# Altium PCB KE_PDB_BMS_ver3.PcbDoc
Units mm, origin at the board's own origin, x right, y up, seen from the top; angles counter-clockwise.
Board outline 59.9 x 59.3 mm, 2 copper layers (L1 [Signal/Power], L4 [GND/Power]), stack 1.299 mm thick; 43 components, 31 nets, 161 pads, 47 vias.
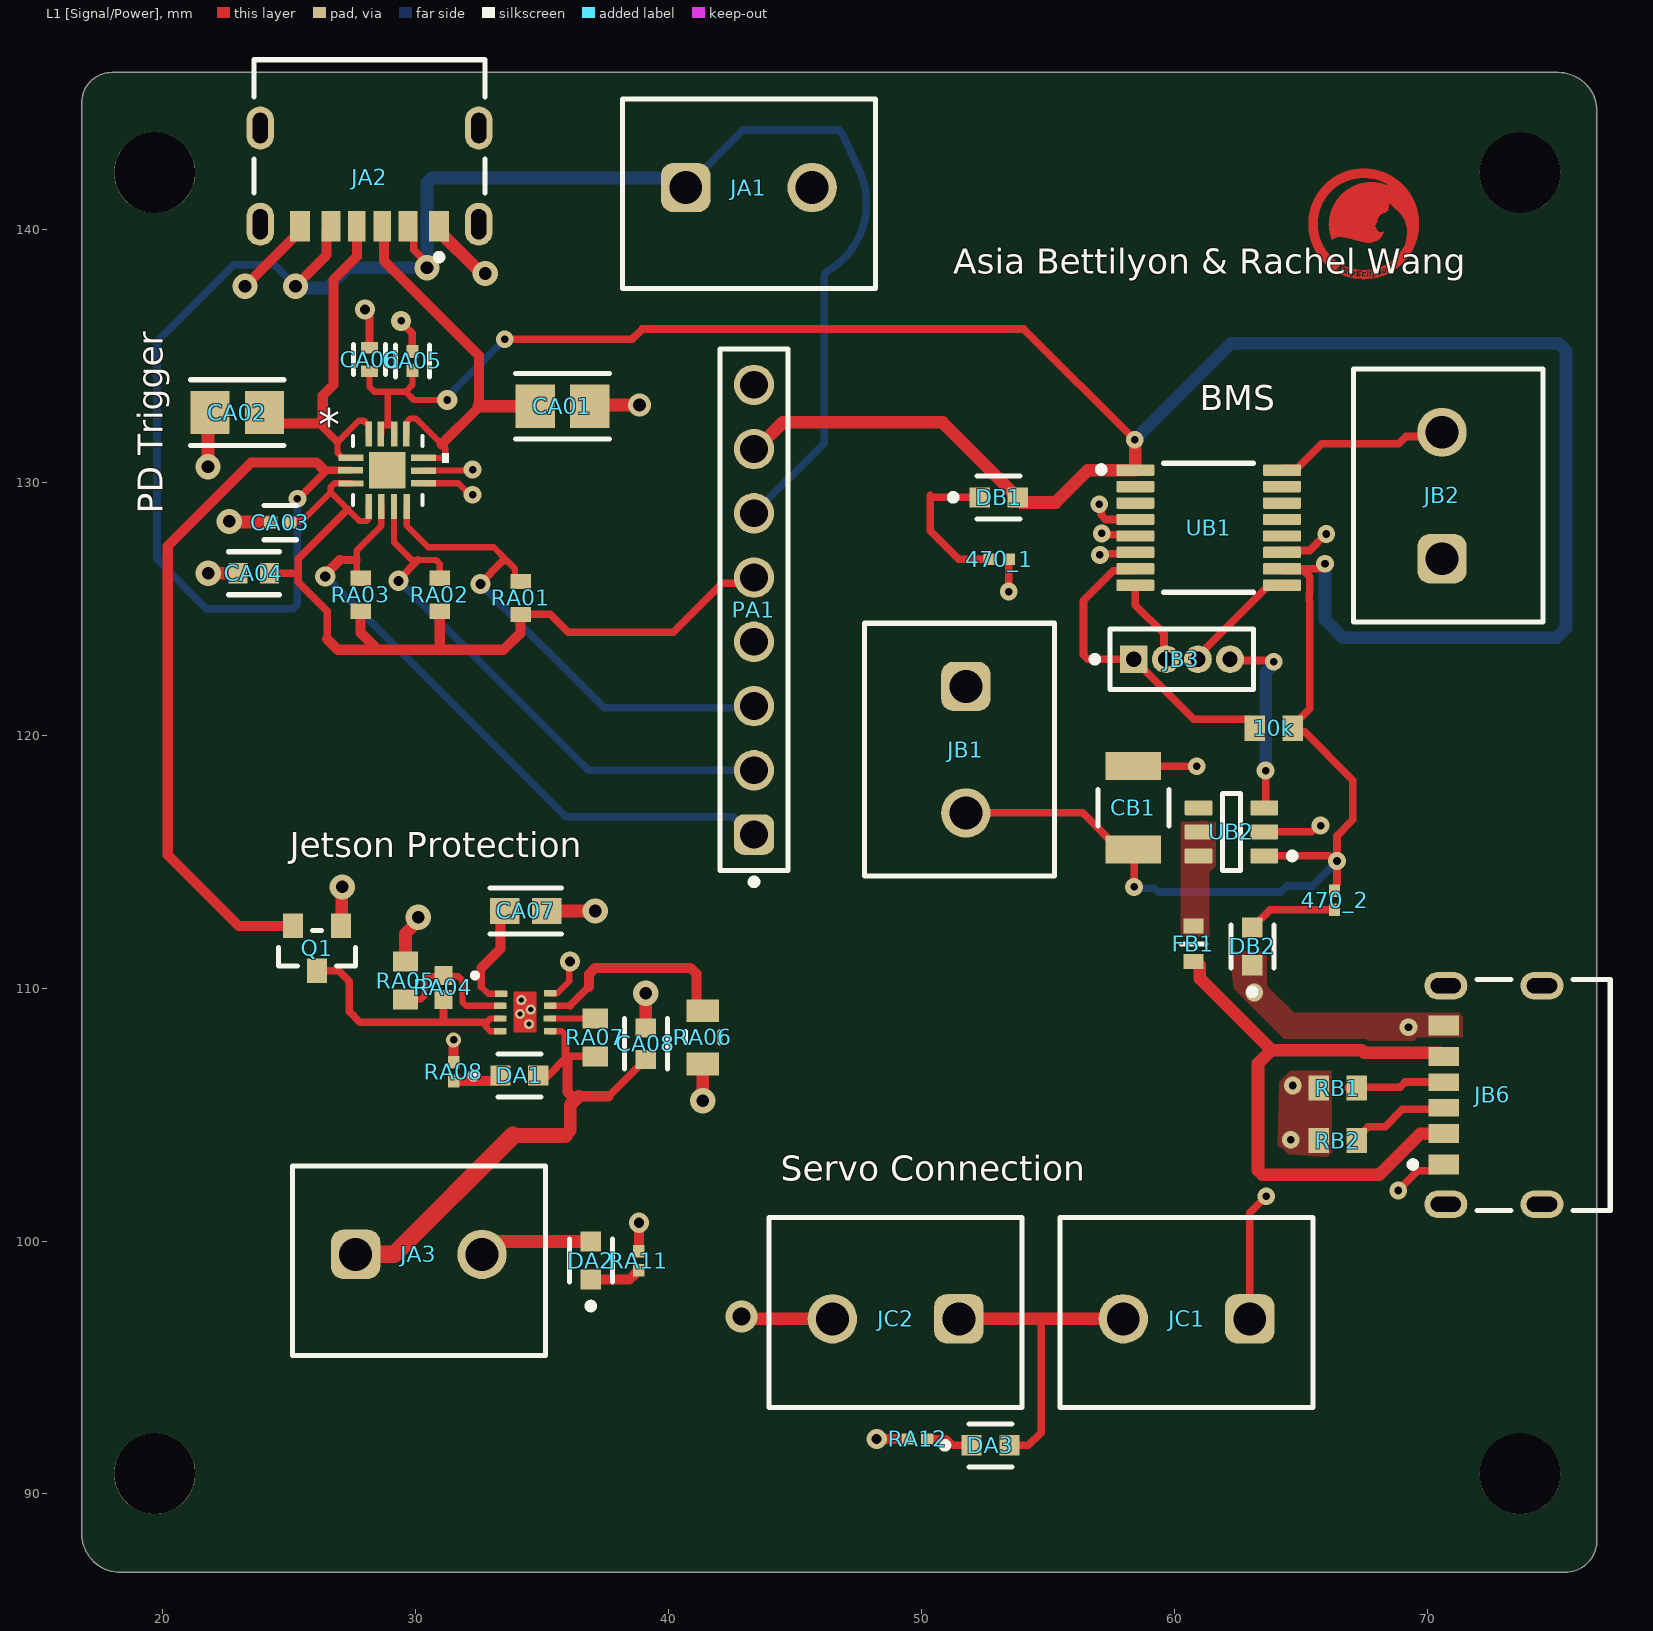
[diagram p0: L1 [Signal/Power] view]
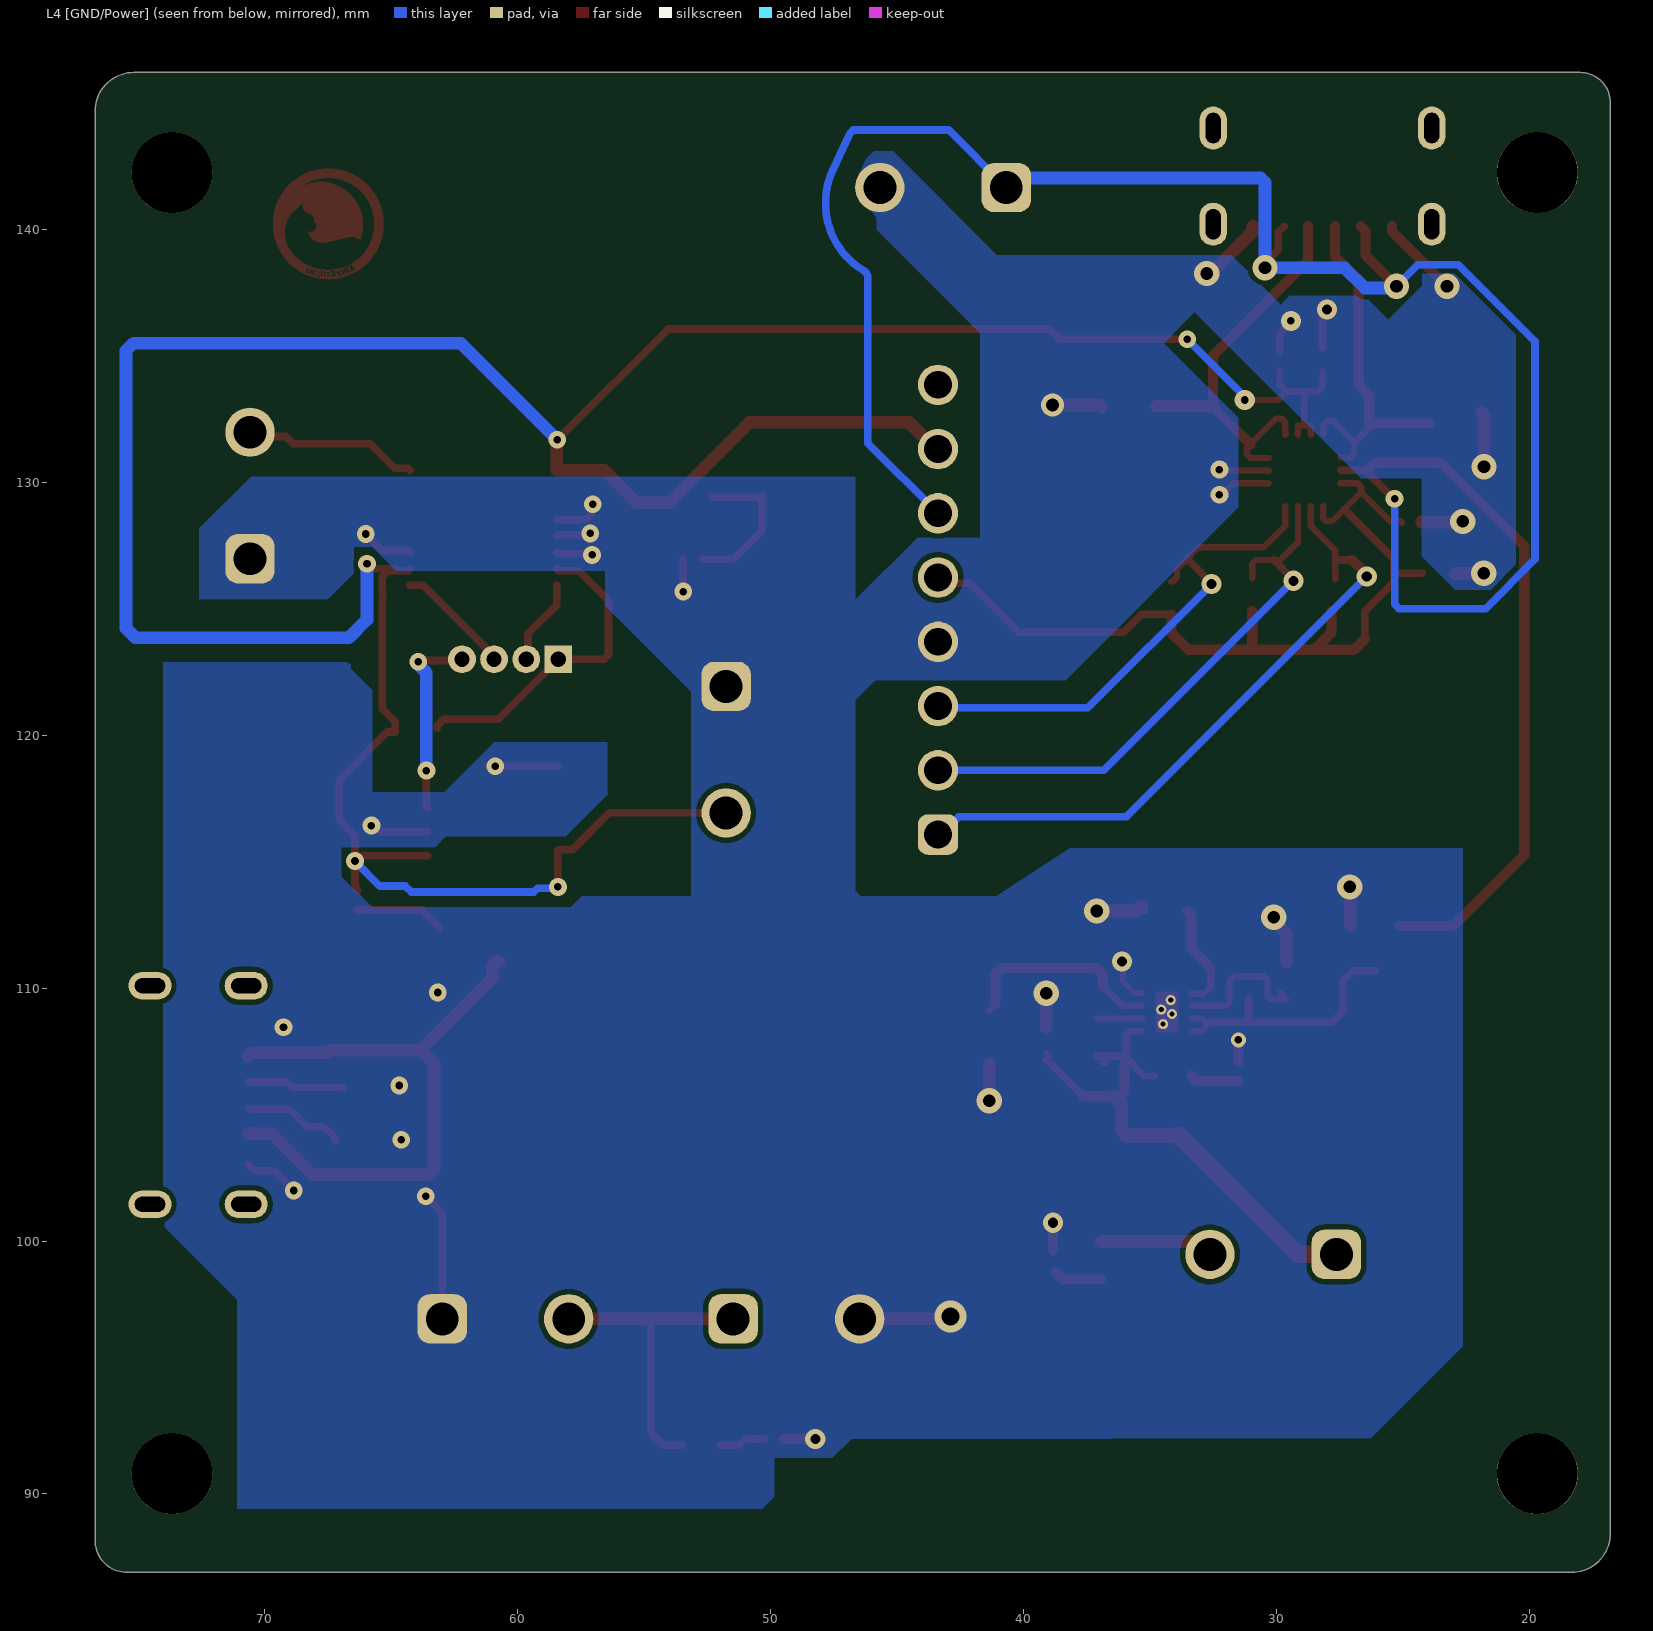
[diagram p1: L4 [GND/Power] view, seen from below]
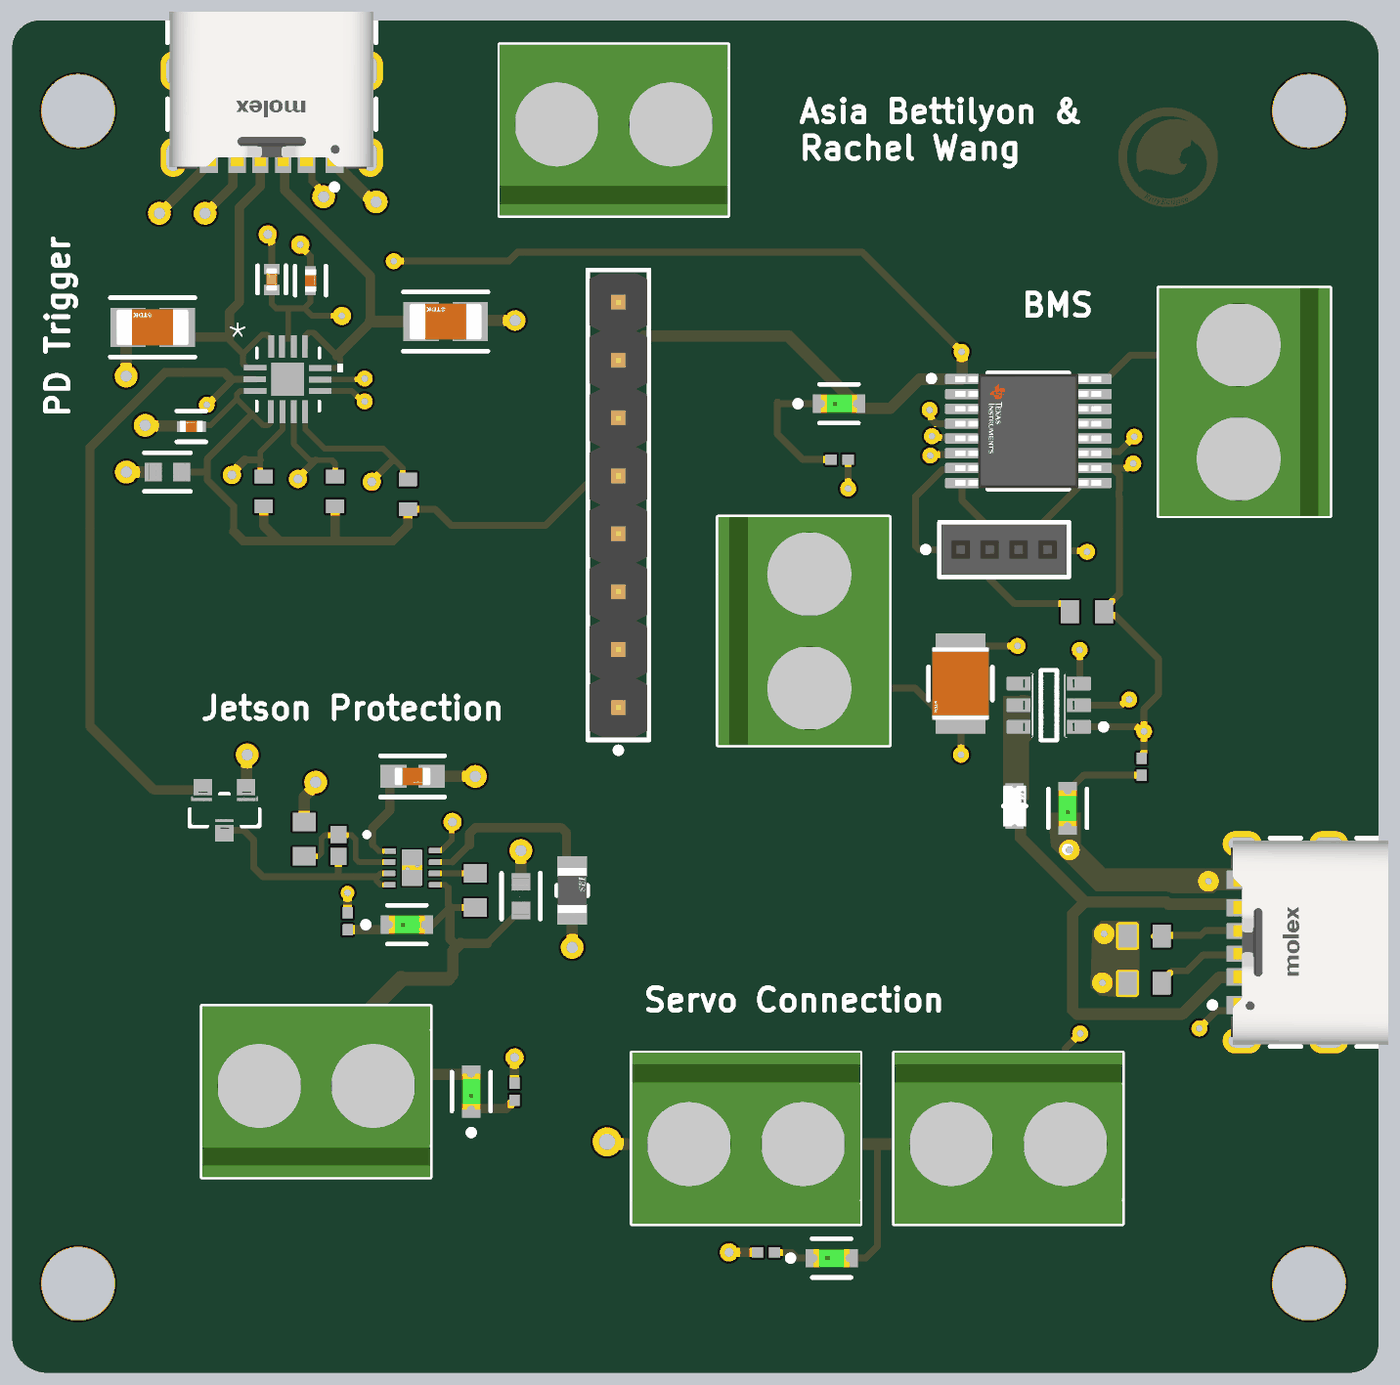
[diagram p2: 3D render of the assembled board from above, using the file's embedded part models]

## Layer stack, top to bottom
Top Solder: solder mask 0.0254, SM-001, Dk 4
L1 [Signal/Power]: signal copper 0.035
Dielectric 1: prepreg 0.1295, PP-017, Dk 4.3
Dielectric 2: prepreg 0.1295, PP-017, Dk 4.3
Dielectric 3: core 0.7112, Core-039, Dk 4.8
Dielectric 4: prepreg 0.1295, PP-017, Dk 4.3
Dielectric 5: prepreg 0.1295, PP-017, Dk 4.3
L4 [GND/Power]: signal copper 0.035
Bottom Solder: solder mask 0.0254, SM-001, Dk 4

## Board outline
16.8,88.432 16.8,145.01 cw(c17.99,145.01) 17.99,146.2 75.168,146.2 cw(c75.168,144.668) 76.7,144.668 76.7,88.17 cw(c75.43,88.17) 75.43,86.9 18.332,86.9 cw(c18.332,88.432)

## Design rules (kind name [scope] priority, off if disabled: settings)
Clearance [All] p1: gap=0.2 ignorepadtopadclearanceinfootprint=TRUE
HoleSize ViaHoleSize [IsVia] p1: absolutevalues=TRUE maxlimit=6.3 minlimit=0.15 maxpercent=80.000 minpercent=20.000
HoleToHoleClearance [All] p1: gap=0.025 allowstackedmicrovias=TRUE
MinimumSolderMaskSliver [All] p1: minsoldermaskwidth=0.025
PolygonConnect [All] p1: connectstyle=Direct reliefconductorwidth=0.254 reliefentries=4 polygonreliefangle="90 Angle" airgapwidth=0.254
RoutingVias [All] p1: holewidth=0.711 width=1.27 viastyle="Through Hole" minholewidth=0.711 minwidth=1.27 maxholewidth=0.711 maxwidth=1.27
SilkToSolderMaskClearance [IsPad] p1: minsilkscreentomaskgap=0.025 clearancetoexposedcopper=TRUE
SolderMaskExpansion [All] p1: expansion=0.102 istentingtop=FALSE
SupplyNets "Schematic Supply Nets" [InNet('GND')] p1: voltage=0.000
UnRoutedNet [All] p1: checkbadconnections=TRUE
Width [All] p1: maxlimit=1 minlimit=0.2 preferedwidth=0.3 minimp=50.000000 maximp=50.000000 favimp=50.000000
25 further rules are at their usual default settings.

## Components (designator, comment, footprint, x,y, rotation, side; value= is the part's Value field where it differs from the comment)
10k "10k" RESC1608X55X25ML10T15 63.925,120.275 r180 top
470_1 "RC0402JR-07470RL" RESC1005X40X25LL05T10 53.075,126.95 r180 top
470_2 "RC0402JR-07470RL" RESC1005X40X25LL05T10 66.325,113.475 r270 top
CA01 "470pF" FP-C3216-085-0_2-IPC_C 35.8,133 r180 top
CA02 "470pF" FP-C3216-085-0_2-IPC_C 22.949,132.75 r180 top
CA03 "0.1uF" FP-CL93-IPC_C 24.65,128.4 r180 top
CA04 "1uF" FP-CL10-IPC_C 23.6,126.4 r180 top
CA05 "0.1uF" FP-CL93-IPC_C 29.875,134.796 r90 top
CA06 "10uF" FP-CL05A106MP5NUNC-MFG 28.175,134.85 r90 top
CA07 "3.3uF" FP-GRM188-0_1-e0_2_0_5-IPC_A 34.35,113.05 r0 top value=3.3nF
CA08 "1uF" FP-CL10-IPC_C 39.1,107.8 r90 top
CB1 "C3225X5R1E106M250AA" FP-C3225-250-0_4-MFG 58.375,117.125 r270 top
DA1 "LED off = fault" FP-LTST-C190GKT-MFG 34.1,106.55 r0 top
DA2 "LED off=fault" FP-LTST-C190GKT-MFG 36.924,99.23 r90 top
DA3 "LED off=fault" FP-LTST-C190GKT-MFG 52.725,91.925 r0 top
DB1 "LTST-C190GKT" FP-LTST-C190GKT-MFG 53.05,129.4 r0 top
DB2 "LTST-C190GKT" FP-LTST-C190GKT-MFG 63.075,111.65 r90 top
FB1 "3A 6V PTC Fuse" FP-PTSLR06036V300-MFG 60.75,111.75 r270 top
JA1 "691137710002" 691137710002 43.175,141.4 r0 top
JA2 "217175-0001" FP-217175-0001-MFG 28.175,143.15 r180 top
JA3 "691137710002" 691137710002 30.125,99.225 r0 top
JB1 "691137710002" 691137710002 51.5,119.425 r270 top
JB2 "691137710002" 691137710002 70.825,129.475 r90 top
JB3 "LPPB041NFFN-RC" FP-LPPB041NFFN-RC-MFG 60.29,123 r0 top
JB6 "217175-0001" FP-217175-0001-MFG 73.675,105.775 r90 top
JC1 "691137710002" 691137710002 60.475,97.175 r180 top
JC2 "691137710002" 691137710002 48.975,97.175 r180 top
PA1 "61300811121" 61300811121 43.375,124.96 r90 top
Q1 "IRLML6402TRPBF" FP-Micro3-MFG 26.1,111.575 r270 top
RA01 "4.7k" RESC1608X55X25LL10T15 34.15,125.425 r90 top value=4.7kOhms
RA02 "4.7k" RESC1608X55X25LL10T15 30.95,125.55 r90 top value=4.7kOhms
RA03 "4.7k" RESC1608X55X25LL10T15 27.825,125.55 r90 top value=4.7kOhms
RA04 "30k" RESC1005X40X25ML10T10 31.1,110.025 r270 top
RA05 "10k" RESC1608X55X25ML10T15 29.6,110.3 r270 top
RA06 "510" FP-RMCF0805-MFG 41.35,108.05 r90 top value=510R
RA07 "10k" RESC1608X55X25ML10T15 37.1,108.05 r90 top value=10kOhms
RA08 "470" RESC1005X40X25LL05T10 31.5,106.7 r90 top
RA11 "470" RESC1005X40X25LL05T10 38.825,99.225 r90 top
RA12 "470" RESC1005X40X25LL05T10 49.85,92.175 r180 top
RB1 "5.1k" RESC1608X55X25ML10T15 66.45,106.05 r0 top
RB2 "5.1k" RESC1608X55X25ML10T15 66.45,103.975 r0 top
UB1 "INA260AIPWR" FP-PW0016A-MFG 61.35,128.2 r0 top
UB2 "TPS22918DBVR" FP-DBV0006A-MFG 62.25,116.175 r180 top

## Footprints (in the part's own frame and the unit in brackets; to place one, negate y for a bottom-side part, rotate by r counter-clockwise, add the part's x,y. Pads: shape width x height; smd on the part's side, far side on the other; paste and mask are expansions set on the pad)
61300811121 [mm] "Pin Header, pitch 2.54 mm, THT, Vertical, single row, 8p"
  rrect50% 1.6x1.6 hole 1.1: 1(-8.89,0)
  round 1.6 hole 1.1: 2(-6.35,0) 3(-3.81,0) 4(-1.27,0) 5(1.27,0) 6(3.81,0) 7(6.35,0) 8(8.89,0)
  silkscreen extent -10.88,-1.35 10.31,1.35, body extent -10.16,-1.27 10.16,1.27, height 8.57
691137710002 [mm] "Horizontal Cable Entry with Pressure Clamp, pitch 5mm, 02p"
  rrect50% 1.95x1.95 hole 1.3: 1(-2.5,0.25)
  round 1.95 hole 1.3: 2(2.5,0.25)
  silkscreen extent -5,-3.75 5,3.75, body extent -5,-3.75 5,3.75, height 11.6
FP-217175-0001-MFG [mm]
  rrect100% 1.1x1.7 hole 1.2 slot 0.6 at 0 deg paste-2539.97 mask+0: 1(-4.32,2.95) 2(4.32,2.95) 3(-4.32,-0.85) 4(4.32,-0.85)
  rect 0.7x1.2 smd paste+0 mask+0: A5(-0.5,3.03) B5(0.5,3.03)
  rect 0.76x1.2 smd paste+0 mask+0: A9(1.52,3.03) B9(-1.52,3.03)
  rect 0.8x1.2 smd paste+0 mask+0: A12(2.75,3.03) B12(-2.75,3.03)
  silkscreen extent -4.57,-3.55 4.57,4.37, body extent -4.97,-3.65 4.97,3.9, height 0.25
FP-C3216-085-0_2-IPC_C [mm]
  rect 1.554x1.706 smd paste+0 mask+0: 1(-1.076,0) 2(1.076,0)
  silkscreen extent -1.85,-1.3 1.85,1.3, body extent -1.95,-1 1.95,1, height 0.25
FP-C3225-250-0_4-MFG [mm]
  rect 1.1x2.2 smd paste+0 mask+0: 1(-1.65,0) 2(1.65,0)
  silkscreen extent -0.72,-1.4 0.72,1.4, body extent -2.3,-1.5 2.3,1.5, height 0.25
FP-CL05A106MP5NUNC-MFG [mm]
  rect 0.45x0.675 smd paste+0 mask+0: 1(-0.463,0) 2(0.463,0)
  silkscreen extent -0.6,-0.63 0.6,0.63, body extent -0.79,-0.45 0.79,0.45, height 0.25
FP-CL10-IPC_C [mm]
  rect 0.758x0.812 smd paste+0 mask+0: 1(-0.627,0) 2(0.627,0)
  silkscreen extent -1.01,-0.85 1.01,0.85, body extent -1.11,-0.55 1.11,0.55, height 0.25
FP-CL93-IPC_C [mm]
  rect 0.515x0.472 smd paste+0 mask+0: 1(-0.379,0) 2(0.379,0)
  silkscreen extent -0.64,-0.67 0.64,0.67, body extent -0.74,-0.38 0.74,0.38, height 0.25
FP-DBV0006A-MFG [mm]
  rrect17% 1.1x0.6 smd paste+0 mask+0: 1(-1.3,0.95) 2(-1.3,0) 3(-1.3,-0.95) 4(1.3,-0.95) 5(1.3,0) 6(1.3,0.95)
  silkscreen extent -2.53,-1.53 0.35,1.53, body extent -1.95,-1.78 1.95,1.78, height 0.25
FP-GRM188-0_1-e0_2_0_5-IPC_A [mm]
  rect 1.159x1.012 smd paste+0 mask+0: 1(-0.827,0) 2(0.827,0)
  silkscreen extent -1.41,-0.91 1.41,0.91, body extent -1.91,-1.01 1.91,1.01, height 0.25
FP-LPPB041NFFN-RC-MFG [mm]
  rect 1.1x1.1 hole 0.6 paste-2539.97 mask+0: 1(-1.905,0)
  round 1.1 hole 0.6 paste-2539.97 mask+0: 2(-0.635,0) 3(0.635,0) 4(1.905,0)
  silkscreen extent -3.56,-1.2 2.84,1.2, body extent -2.94,-1.3 2.94,1.3, height 0.25
FP-LTST-C190GKT-MFG [mm]
  rect 0.8x0.8 smd paste+0 mask+0: 1(-0.75,0) 2(0.75,0)
  silkscreen extent -1.92,-0.85 0.85,0.85, body extent -1.25,-0.55 1.25,0.55, height 0.25
FP-Micro3-MFG [mm]
  rect 0.972x0.802 smd paste+0 mask+0: 1(-0.885,0.95) 2(-0.885,-0.95) 3(0.885,0)
  silkscreen extent -0.7,-1.52 0.7,1.52, body extent -1.47,-1.87 1.47,1.87, height 0.25
FP-PTSLR06036V300-MFG [mm]
  rect 0.6x0.8 smd paste+0 mask+0: 1(-0.7,0) 2(0.7,0)
  silkscreen extent 0,-0.5 0,0.5, body extent -1.1,-0.6 1.1,0.6, height 0.25
FP-PW0016A-MFG [mm]
  rrect22% 1.5x0.45 smd paste+0 mask+0: 1(-2.9,2.275) 2(-2.9,1.625) 3(-2.9,0.975) 4(-2.9,0.325) 5(-2.9,-0.325) 6(-2.9,-0.975) 7(-2.9,-1.625) 8(-2.9,-2.275) 9(2.9,-2.275) 10(2.9,-1.625) 11(2.9,-0.975) 12(2.9,-0.325) 13(2.9,0.325) 14(2.9,0.975) 15(2.9,1.625) 16(2.9,2.275)
  silkscreen extent -4.37,-2.55 1.78,2.55, body extent -3.75,-2.8 3.75,2.8, height 0.25
FP-RMCF0805-MFG [mm]
  rect 0.9x1.3 smd paste+0 mask+0: 1(-1.05,0) 2(1.05,0)
  silkscreen extent -0.23,-0.67 0.23,0.67, body extent -1.6,-0.77 1.6,0.77, height 0.25
RESC1005X40X25LL05T10 [mm] "Chip Resistor, 2-Leads, Body 1.00x0.50mm, IPC High Density"
  rect 0.5x0.45 smd: 1(-0.375,0) 2(0.375,0)
  body extent -0.53,-0.27 0.53,0.28, height 0.4
RESC1005X40X25ML10T10 [mm] "Chip Resistor, 2-Leads, Body 1.00x0.50mm, IPC Low Density"
  rect 0.75x0.7 smd: 1(-0.475,0) 2(0.475,0)
  body extent -0.55,-0.3 0.55,0.3, height 0.4
RESC1608X55X25LL10T15 [mm] "Chip Resistor, 2-Leads, Body 1.60x0.80mm, IPC High Density"
  rect 0.6x0.8 smd: 1(-0.65,0) 2(0.65,0)
  body extent -0.85,-0.45 0.85,0.45, height 0.55
RESC1608X55X25ML10T15 [mm] "Chip Resistor, 2-Leads, Body 1.60x0.80mm, IPC Low Density"
  rect 0.8x1 smd: 1(-0.75,0) 2(0.75,0)
  body extent -0.85,-0.45 0.85,0.45, height 0.55

## Part data
10k RA05 RA07: library part CMP-2000-05022-1, "Resistor, 10 KOhm, +/- 5%, 100 mW, -55 to 155 degC, 0603 (1608 Metric), RoHS, Tape and Reel", Case Code - in=0603, Case Code - mm=1608, Manufacturer=Yageo, Operating Temperature Range=-55Cto+155C, Package Description="2-Pin Surface Mount Device, Body 1.6 x 0.8 mm", Package Reference=603, Power Rating=100mW, Resistance=10kOhms, Temperature Coefficient=100PPM/C, Tolerance=5%, Voltage Rating=50V, Datasheet URL=http://www.farnell.com/datasheets/443971.pdf, Datasheet Version="Rev. 4, 04/2009", Manufacturer URL=http://www.yageo.com/, Packaging=Reel, Product=ThickFilmResistorsGeneralPurpose, Series=RC, Termination Style=SMD/SMT
470_1 470_2: library part CMP-1011-00066-2, Manufacturer="Yageo / Phycomp", Part Number=RC0402JR-07470RL
CA01 CA02: library part CMP-08246-003272-1, "Multilayer Ceramic Capacitors 470pF ±5% 630V C0G SMD 1206", Case Code (Imperial)=1206, Case Code (Metric)=3216, Dielectric=C0G, Max Operating Temperature=125°C, Min Operating Temperature=-55°C, Package Quantity=1, Tolerance=5%, Voltage Rating=630V, Capacitance=470pF, Case/Package=1206, Depth=1.6mm, Height=0.85mm, Lead Free="Lead Free", Length=3.2mm, Mount="Surface Mount", Number of Pins=2, Packaging="Tape and Reel", Radiation Hardening=No, RoHS Compliant=Yes, Series=C, Termination=SMD/SMT, Thickness=0.039inch, Voltage Rating (DC)=630V, Weight=0.000571oz, Width=0.063inch
CA03 CA05: library part CMP-13271-000610-1, "Cap Ceramic 100nF 10V X7R ±10% SMD 0402 +125°C Paper T/R"
CA04 CA08: library part CMP-2000-06094-2, "Cap Ceramic 1uF 10V X7R ±10% Pad SMD 0603 +125°C T/R", Case Code (Imperial)=0603, Case Code (Metric)=1608, Dielectric=X7R, Max Operating Temperature=125°C, Min Operating Temperature=-55°C, Package Quantity=1, Tolerance=10%, Voltage Rating=10V, Capacitance=1uF, Case/Package=0603, Contact Plating=Tin, Depth=0.8mm, Height=0.8mm, Lead Free="Lead Free", Length=1.6mm, Mount="Surface Mount", Packaging="Tape and Reel", Radiation Hardening=No, Thickness=0.035inch, Voltage Rating (DC)=10V, Width=0.031inch
CA06: library part CMP-13271-000002-1, "CAP CER 10UF 10V X5R 0402", Manufacturer=Samsung, Manufacturer Part Number=CL05A106MP5NUNC, Temperature="-55°C to +85°C", Temperature Characteristic=X5R, Temperature Coefficient=15%, Temperature Range High=+85°C, Temperature Range Low=-55°C, Tolerance=20%, Voltage Rating=10V, Automotive=No, Capacitance=10uF, Category=Cap, ComponentLink2Description=Datasheet, ComponentLink2URL=http://www.samsungsem.com/kr/support/product-search/mlcc/__icsFiles/afieldfile/2019/05/10/19-CL05A106MP5NUNC.pdf, Device Class L1="Passive Components", Device Class L2=Capacitors, Device Class L3="Ceramic Capacitors", Digikey Description="CAP CER 10UF 10V X5R 0402", Height=0.7mm, Ipc Land Pattern Name=CAPC10050X50, Lead Free=Yes, Material=Ceramic, Octopart=https://octopart.com/cl05a106mp5nunc-samsung-22457395, Package=CL05A106MP5NUNC, RoHS=TRUE
CA07: library part CMP-2006-02467-2, "Chip Multilayer Ceramic Capacitors for General Purpose, 0603, 3300pF, C0G, 30ppm/°C, 5%, 50V", Capacitance=3.3nF, Case Code (Imperial)=0603, Case Code (Metric)=1608, Dielectric=C0G, Max Operating Temperature=125°C, Min Operating Temperature=-55°C, Package Quantity=4000, Tolerance=5%, Voltage=50V, Case/Package=0603, Depth=0.8mm, Height=0.8mm, Lead Free="Lead Free", Length=1.6mm, Material=Ceramic, Mount="Surface Mount", Packaging="Tape and Reel", Radiation Hardening=No, REACH SVHC="No SVHC", Termination=SMD/SMT, Thickness=0.035inch, Voltage Rating=50V, Voltage Rating (DC)=50V, Width=0.031inch
CB1: library part CMP-08246-006012-1, "Multilayer Ceramic Capacitors 10uF ±20% 25V X5R SMD 1210", Capacitance=10uF, Case Code (Imperial)=1210, Case Code (Metric)=3225, Dielectric=X5R, Dielectric Material=Ceramic, Max Operating Temperature=85°C, Min Operating Temperature=-55°C, Package Quantity=1, Tolerance=20%, Voltage=25V, Case/Package=1210, Construction=Flat, Depth=2.5mm, Height=2.5mm, Lead Free="Lead Free", Length=3.2mm, Mount="Surface Mount", Number of Pins=2, Packaging="Tape and Reel", Radiation Hardening=No, REACH SVHC="No SVHC", Resistor Type=Ceramic, RoHS Compliant=Yes, Series=C, Termination=SMD/SMT, Thickness=0.11inch, Voltage Rating=25V, Voltage Rating (DC)=25V, Weight=0.000564oz, Width=0.098inch
DA1 DA2 DA3 DB1 DB2: library part CMP-22017-000005-2, "LED GREEN CLEAR CHIP SMD", Case Code (Imperial)=0603, Case Code (Metric)=1608, Color=Green, Forward Current=30mA, Forward Voltage=2.1V, Lens Color=Colorless, Max Operating Temperature=85°C, Min Operating Temperature=-55°C, Package Quantity=1, Power Dissipation=100mW, Reverse Voltage=5V, Test Current=10mA, Voltage=2V, Case/Package=0603, Depth=0.8mm, Dominant Wavelength=569nm, Height=0.8mm, Illumination Color=Green, Lead Free="Lead Free", Length=1.6mm, Lens Style=Clear, Lens Transparency=Clear, Luminous Intensity=6mcd, Mount="Surface Mount", Number of Elements=1, Number of LEDs=1, Number of Pins=2, Packaging="Tape and Reel", Power Rating=100mW, Radiation Hardening=No, Viewing Angle=130°, Wavelength=565nm, Width=0.8mm
FB1: library part CMP-16244-000012-1, "PTC RESET FUSE 3A 6V 0603"
JA1 JA3 JB1 JB2 JC1 JC2: library part CMP-1502-03324-2, Current Rating=16A, Max Operating Temperature=120°C, Min Operating Temperature=-30°C, Voltage Rating=300V, Contact Material="Nickel, Tin", Height=11.6mm, Lead Pitch=5mm, NexarPartId=78871135, Number of Contacts=2, Number of Pins=2, Number of Rows=1, Packaging=Box, RoHS=Non-Compliant
JA2 JB6: library part CMP-04767-000026-1, "CONN RCP USB2.0 C 6+18P SMD RA"
JB3: library part CMP-25680-000035-1, "CONN HDR 4POS 0.05 GOLD PCB", Package Quantity=1, Connector Type=Header, Contact Plating=Gold, Contact Type="Female Socket", Lead Free="Lead Free", Mount="Through Hole", Number of Positions=4, Number of Rows=1, Packaging=Bulk, Pitch=0.05inch, RoHS Compliant=Yes, Termination=Solder
PA1: library part CMP-1502-01076-3, Color=Black, Contact Resistance=20mΩ, Current Rating=3A, Max Operating Temperature=105°C, Min Operating Temperature=-40°C, Operating Supply Voltage=250V, Connector Type="Male Pin", Contact Material=Copper, Contact Mating Length=5.9944mm, Contact Plating=Gold, Gender=Male, Height=8.54mm, Lead Pitch=2.54mm, Mount="Through Hole", NexarPartId=32855533, Number of Contacts=8, Number of Pins=8, Number of Positions=8, Number of Rows=1, Orientation=Vertical, Packaging=Bulk, Pitch=2.54mm, REACH SVHC=Unknown, RoHS=Compliant, Termination=Solder, Voltage Rating=250V
Q1: library part CMP-32901-000130-1, "MOSFET P-CH 20V 3.7A SOT-23", Continuous Drain Current=-3.7A, Drain To Source Breakdown Voltage=-20V, Drain To Source Resistance=0.05Ω, Gate To Source Voltage=12V, Input Capacitace At Vds="633pF @ -10V", Manufacturer=Infineon, Max Forward Diode Voltage=-1.2V, Max Junction Temp=+150°C, Package=Micro3, Power Dissipation=1.3W, Pulse Drain Current=-22A, Temperature="-55°C to +150°C", Temperature Range Low=-55°C, Automotive=No, Category=Trans, ComponentLink2Description=Datasheet, ComponentLink2URL=https://www.infineon.com/dgdl/irlml6402pbf.pdf?fileId=5546d462533600a401535668d5c2263c, Depletion Mode=False, Device Class L1="Discrete Semiconductors", Device Class L2=Transistors, Device Class L3=MOSFETs, Digikey Description="MOSFET P-CH 20V 3.7A SOT-23", Drain To Source Voltage=-20V, Footprint Url=http://irf.com/package/outline/po_micro3.pdf, Gate Charge At Vgs="8nC @ -5V", Height=1.12mm, Ipc Land Pattern Name=SOT95P237X100-3, Lead Free=Yes, Manufacturer Part Number=IRLML6402TRPBF, Number Of Channels=1, Number Of P Channels=1, Octopart=https://octopart.com/irlml6402trpbf-infineon-65874989, Reverse Recovery Charge=11nC, Reverse Recovery Time=29ns, RoHS=TRUE, Rthja Max=75°C/W, Standoff Height=0.01mm, Technology=MOSFET, Temperature Range High=+150°C, Threshold Vgs=-0.55V, Threshold Vgs Max=-1.2V, Threshold Vgs Min=-0.4V, Turn Off Delay Time=588ns, Turn On Delay Time=350ns
RA01 RA02 RA03: library part CMP-2000-06942-1, "Chip Resistor, 4.7 KOhm, +/- 1%, 0.1 W, -55 to 155 degC, 0603 (1608 Metric), RoHS, Tape and Reel", Case Code - in=0603, Case Code - mm=1608, Manufacturer=Yageo, Operating Temperature Range=-55Cto+155C, Package Description="2-Pin Surface Mount Device, Body 1.6 x 0.8 mm", Power Rating=100mW, Resistance=4.7kOhms, Temperature Coefficient=100PPM/C, Tolerance=1%, Voltage Rating=50V, Datasheet URL=http://www.yageo.com/documents/recent/PYu-RC_Group_51_RoHS_L_7.pdf, Datasheet Version="Rev. 7, 05/2017", Manufacturer URL=http://www.yageo.com/, Mounting Technology=SurfaceMount, Package Reference=0603, Packaging=Reel, Product=ThickFilmResistorsGeneralPurpose, Series=RC, Termination Style=SMD/SMT
RA04: library part CMP-2002-05800-1, Manufacturer=Panasonic, Part Number=ERA-2AEB303X
RA06: library part CMP-26527-004489-1, "510Ω ±5% 0.125W 0805 Thick Film Chip Resistor AEC-Q200 compliant", Case Code (Imperial)=0805, Case Code (Metric)=2012, Max Operating Temperature=155°C, Max Power Dissipation=125mW, Min Operating Temperature=-55°C, Resistance=510R, Resistor Type="Thick Film", Temperature Coefficient=200ppm/°C, Tolerance=5%, Case/Package=0805, Construction=Rectangular, Contact Plating=Tin, Depth=1.25mm, Features="Automotive AEC-Q200", Height=0.026inch, Lead Free="Lead Free", Length=0.079inch, Military Standard=Not, Mount="Surface Mount", Number of Terminations=2, Packaging="Tape and Reel", Power Rating=125mW, Radiation Hardening=No, RoHS Compliant=Yes, Series=RMCF, Size Code=0805, Width=0.049inch
RA08 RA11 RA12: library part CMP-1011-00066-2, Manufacturer="Yageo / Phycomp", Part Number=RC0402JR-07470RL
RB1 RB2: library part CMP-2000-04091-1, Manufacturer=Yageo, Part Number=RC0603FR-075K1L
UB1: library part CMP-04910-000015-1, "IC MONITOR PWR/CURR 16TSSOP", Ambient Temperature Range High=+125°C, Ambient Temperature Range Low=-40°C, Manufacturer="Texas Instruments", Max Junction Temp=+150°C, Max Supply Voltage=5.5V, Min Supply Voltage=2.7V, Nominal Supply Current=310uA, Output Current=10mA, Package=PW0016A, Temperature="-40°C to +125°C", Automotive=No, Category=IC, ComponentLink2Description=Datasheet, ComponentLink2URL=http://www.ti.com/lit/ds/symlink/ina260.pdf, Device Class L1="Integrated Circuits (ICs)", Device Class L2="Power Management ICs", Device Class L3=unset, Digikey Description="IC MONITOR PWR/CURR 16TSSOP", Height=1.2mm, Lead Free=Yes, Manufacturer Part Number=INA260AIPWR, Octopart=https://octopart.com/ina260aipwr-texas+instruments-75199489, RoHS=TRUE, Standoff Height=0.05mm, Temperature Range High=+125°C, Temperature Range Low=-40°C
UB2: library part CMP-04910-000024-2, "IC SINGLE CHANNEL LOAD SWITCH", Ambient Temperature Range High=105°C, Case/Package=SOT-23, Manufacturer Lifecycle Status=ACTIVE, Max Junction Temperature (Tj)=125°C, Max Output Current=2A, Max Supply Voltage=5.5V, Min Operating Temperature=-40°C, Min Supply Voltage=1V, Fall Time=2µs, Height=1.45mm, Interface=On/Off, Lead Free="Lead Free", Length=2.9mm, Lifecycle Status=Production, Max Operating Temperature=105°C, NexarPartId=71360943, Number Of Channels=1, Number of Drivers=1, Number of Outputs=1, Number of Pins=6, Output Configuration="High Side", Output Current=2A, Rise Time=2.54ms, RoHS=Compliant, Schedule B="8542390000, 8542390000", Thickness=1.2mm, Turn-Off Delay Time=2µs, Turn-On Delay Time=1.95ms, Width=1.6mm

## Free pads (board coordinates)
  rect 0.991x0.254 smd paste+0 mask+0: 1(27.45,130.975) 2(27.425,130.475) 3(27.45,129.95) 8(30.303,129.959) 9(30.303,130.459) 10(30.303,130.959)
  rrect25% 0.5x0.25 smd mask+0: 1(33.38,109.776) 2(33.345,109.3) 3(33.345,108.8) 4(33.345,108.3) 5(35.315,108.3) 6(35.305,108.801) 7(35.315,109.3) 8(35.315,109.8)
  rect 0.254x0.991 smd paste+0 mask+0: 4(28.142,129.048) 5(28.642,129.048) 6(29.142,129.048) 7(29.642,129.048) 11(29.625,131.9) 12(29.15,131.9) 13(28.625,131.9) 14(28.15,131.9)
  rect 0.1x0.1 smd paste-1 mask+0: 9(34.475,108.575)
  round 0.4 hole 0.2 mask+0: 10(34.55,109.15) 11(34.125,108.975)
  rect 1.448x1.448 smd paste+0 mask+0: 15(28.875,130.475)
  round 3.2 hole 3.2: 16(19.685,142.24) 17(73.66,142.24) 20(19.685,90.805) 21(73.66,90.805)
  round 0.4 hole 0.2: 25(34.475,108.575) 26(34.175,109.525)

## Via types
v1: diameter 0.7, hole 0.3, L1 [Signal/Power] to L4 [GND/Power], 23 vias
v2: diameter 1, hole 0.5, L1 [Signal/Power] to L4 [GND/Power], 12 vias
v3: diameter 0.8, hole 0.4, L1 [Signal/Power] to L4 [GND/Power], 7 vias
v4: diameter 0.8, hole 0.3, L1 [Signal/Power] to L4 [GND/Power], 2 vias
v5: diameter 0.9, hole 0.5, L1 [Signal/Power] to L4 [GND/Power], 1 vias
v6: diameter 1.27, hole 0.711, L1 [Signal/Power] to L4 [GND/Power], 1 vias
v7: diameter 0.6, hole 0.3, L1 [Signal/Power] to L4 [GND/Power], 1 vias

## Nets (pads, with @x,y where several pads share a name; then routed paths per layer and width w, separated by ;. In a path a pad name is that pad's centre, name@x,y a point inside that pad or via, vN(x,y) a via of type N, cw(c..) or ccw(c..) an arc to the next point about the centre after c; other vN are vias at no path point)
GND: 470_1.1 CA01.1 CA02.2 CA03.2 CA04.2 CA05.2 CA06.2 CA07.2 CA08.2 CB1.1 DB2.1 JA1.2 JA2.A12 JA2.B12 JB1.1 JB2.1 JB6.A12 JB6.B12 JC1.1 JC2.2 PA1.4 pad.8 pad.9 pad.10@34.55,109.15 pad.11@34.125,108.975 pad.25 pad.26 Q1.1 RA05.1 RA06.1 RA08.2 RA11.2 RA12.2 RB1.1 RB2.1 UB1.4 UB1.5 UB1.6 UB1.11 UB2.2 | length 57.4
  L1 [Signal/Power] w0.25: pad.8@30.303,129.959 31.684,129.959 32.143,129.5 v1(32.25,129.5) ; pad.9@30.303,130.459 30.305,130.461 32.211,130.461 v1(32.25,130.5) ; CA07.2 CA07.2@35.35,113.223 ; pad.8@35.315,109.8 35.6,109.8 36.075,110.275 36.075,111.025 v3(36.1,111.05)
  L1 [Signal/Power] w0.254: v6(42.881,97.024) 42.881,97.019 v6@42.975,96.925
  L1 [Signal/Power] w0.3: CA02.2 CA02.2@21.875,132.748 ; v2(22.625,128.45) v2@22.65,128.425 ; CA03.2@24.246,128.375 CA03.2 CA03.2@24.246,128.425 ; v3(28,136.825) 28,136.69 28.175,136.515 28.175,135.388 CA06.2 ; v4(29.425,136.375) 29.425,136.319 29.861,135.883 29.861,135.283 29.875,135.269 CA05.2 ; CA01.1 CA01.1@36.901,132.975 ; JA1.2 JA1.2@45.7,141.675 ; v1(53.45,125.675) 470_1.1 ; v1(57.025,129.125) 57.102,129.048 57.102,128.71 57.286,128.525 UB1.4 ; v1(57.05,127.125) 57.1,127.175 58.4,127.175 UB1.6 ; v1(57.125,127.975) 57.175,127.925 58.4,127.925 UB1.5 ; CB1.1 v1(60.875,118.775) ; JC1.1 62.975,101.125 v1(63.625,101.775) ; UB2.2 65.417,116.175 65.667,116.425 v1(65.775,116.425) ; UB1.11 64.325,127.3 65.344,127.3 v1(65.997,127.953) ; v1(68.85,102) 69.625,102.775 70.395,102.775 JB6.B12
  L1 [Signal/Power] w0.4: v2(23.25,137.75) 23.255,137.75 25.425,139.92 JA2.A12 ; RA08.2 v7(31.5,107.95) ; RA11.2 v3(38.825,100.725) ; v3(48.225,92.175) RA12.2
  L1 [Signal/Power] w0.5: v2(21.791,130.609) 21.791,132.663 CA02.2@21.875,132.748 ; v2(21.8,126.4) 22.873,126.4 CA04.2@22.923,126.35 ; v2@22.65,128.425 CA03.2@24.246,128.425 ; Q1.1 27.075,112.485 27.075,113.975 v2(27.1,114) ; RA05.1 29.6,112.151 30.1,112.651 v2(30.1,112.8) ; JA2.B12 30.925,139.92 32.499,138.346 32.654,138.346 v2(32.75,138.25) ; CA07.2@35.35,113.223 35.35,113.206 35.506,113.05 v2(37.1,113.05) ; CA01.1@36.901,132.975 36.976,133.05 v5(38.85,133.05) ; CA08.2 v2(39.1,109.8) ; v2(41.35,105.55) RA06.1 ; v6@42.975,96.925 JC2.2
  other v1: 64.6,104 64.675,106.15 69.25,108.45 63.15,109.825
Net10k_1: 10k.1 470_2.1 CA05.1 CA06.1 CB1.2 DB1.2 JB1.2 PA1.7 pad.12 pad.13 UB1.1 UB1.10 UB2.1 | length 134.9
  L1 [Signal/Power] w0.25: CA06.1 28.175,133.775 28.37,133.58 28.892,133.58 ; pad.13 28.644,131.872 28.644,132.24 28.892,132.24 ; pad.12@29.144,131.872 pad.12 29.142,132.238 29.14,132.24 28.892,132.24 ; CA05.1 29.875,133.85 29.605,133.58 28.892,133.58 ; 28.892,132.24 28.892,133.58
  L1 [Signal/Power] w0.254: 29.605,133.58 29.934,133.25 v4(31.25,133.25)
  L1 [Signal/Power] w0.3: v1(33.525,135.65) 38.552,135.65 38.957,136.055 54.045,136.055 v1(58.425,131.675) ; JB1.2 56.375,116.925 57.825,115.475 CB1.2 58.4,115.45 v1(58.4,114) ; UB2.1 66.117,115.225 66.317,115.025 v1(66.425,115.025) ; UB1.10 64.325,126.5 65.116,126.5 65.35,126.266 65.35,125.584 65.332,125.566 65.332,125.318 65.35,125.3 65.35,121.05 64.825,120.525 64.825,120.125 65.15,120.125 67.05,118.225 67.05,116.65 66.425,116.025 v1(66.425,115.025) ; UB1.10@64.85,126.575 65.75,126.575 v1(65.95,126.775) ; 470_2.1 66.4,113.925 66.4,114.101 66.425,114.126 v1(66.425,115.025)
  L1 [Signal/Power] w0.5: PA1.7 43.457,131.31 44.512,132.365 50.835,132.365 53.936,129.264 DB1.2@53.936,129.25 ; DB1.2@53.936,129.2 55.3,129.2 56.575,130.475 UB1.1 58.45,131.65 v1(58.425,131.675)
  L4 [GND/Power] w0.3: v4(31.25,133.25) 31.25,133.375 v1(33.525,135.65) ; v1(58.4,114) 58.45,113.95 59.2,113.95 59.35,113.8 64.2,113.8 64.436,114.036 65.436,114.036 v1(66.425,115.025)
  L4 [GND/Power] w0.5: v1(58.425,131.675) 62.25,135.5 75.175,135.5 75.475,135.2 75.475,124.225 75.1,123.85 66.668,123.85 65.95,124.568 v1(65.95,126.775)
Net10k_2: 10k.2 JB3.1 UB1.7 | length 12.7
  L1 [Signal/Power] w0.3: UB1.7 58.375,126.5 57.584,126.5 56.4,125.316 56.4,123.176 56.576,123 JB3.1 58.785,122.6 58.785,122.597 60.757,120.625 62.925,120.625 63.175,120.375 10k.2
Net470_1_2: 470_1.2 DB1.1 | length 6.2
  L1 [Signal/Power] w0.3: DB1.1 50.425,129.4 50.35,129.475 50.35,128.075 51.45,126.975 51.475,126.95 470_1.2
Net470_2_2: 470_2.2 DB2.2 | length 3.5
  L1 [Signal/Power] w0.3: DB2.2 63.775,113.1 470_2.2
NetCA01_2: CA01.2 JA2.A5 pad.10@30.303,130.959 pad.11@29.625,131.9 | length 16.8
  L1 [Signal/Power] w0.25: pad.11@29.625,131.9 29.644,131.872 29.644,132.369 29.796,132.521 30.004,132.521 31.025,131.5 31.175,131.35 31.175,131.105 31.029,130.959 pad.10@30.303,130.959
  L1 [Signal/Power] w0.4: JA2.A5@28.75,140.12 28.75,138.75 32.5,135 32.5,133 ; 31.025,131.5 32.5,132.975
  L1 [Signal/Power] w0.5: 32.5,133 33,133 CA01.2
NetCA02_1: CA02.1 JA2.B5 pad.1@27.45,130.975 pad.14 | length 14.7
  L1 [Signal/Power] w0.25: pad.1@27.45,130.975 27.113,130.959 26.911,131.161 26.911,131.586 27.749,132.424 27.956,132.424 28.14,132.24 28.142,132.238 pad.14
  L1 [Signal/Power] w0.3: 26.249,132.248 26.911,131.586
  L1 [Signal/Power] w0.4: CA02.1@23.95,132.325 26.325,132.325 26.325,133.425 26.75,133.85 26.75,138 27.675,138.925 JA2.B5
NetCA03_1: CA03.1 CA04.1 PA1.5 pad.3@27.45,129.95 pad.4@28.142,129.048 RA01.1 RA02.1 RA03.1 | length 35.9
  L1 [Signal/Power] w0.25: CA03.1 25.083,128.455 25.498,128.455 26.647,129.603 ; pad.3@27.45,129.95 27.479,129.957 26.793,129.957 26.647,129.811 26.647,129.603 ; pad.4@28.142,129.048 28.142,128.612 cw(c27.994,128.612) 27.994,128.464 27.786,128.464 27.312,128.938 26.647,129.603
  L1 [Signal/Power] w0.3: CA04.1 25.308,126.4 25.353,126.355 ; 26.504,123.796 26.504,124.9 25.353,126.051 25.353,126.355 ; 27.312,128.938 25.353,126.979 25.353,126.355 ; RA01.1 35.323,124.775 36.028,124.07 40.185,124.07 42.125,126.01 43.155,126.01 PA1.5
  L1 [Signal/Power] w0.4: 26.504,123.796 26.925,123.375 28.5,123.375 ; RA03.1 27.825,124.05 28.5,123.375 ; RA02.1 30.95,123.425 31,123.375 ; RA01.1 34.15,124.05 33.475,123.375 31,123.375 ; 28.5,123.375 31,123.375
NetCA07_1: CA07.1 pad.1@33.38,109.776 | length 4.3
  L1 [Signal/Power] w0.25: 32.6,110.05 32.874,109.776 pad.1@33.38,109.776
  L1 [Signal/Power] w0.3: 32.6,110.05 32.6,110.8
  L1 [Signal/Power] w0.4: 32.6,110.8 33.35,111.55 33.35,112.877 CA07.1
NetCA08_1: CA08.1 DA1.2 JA3.1 pad.5@35.315,108.3 RA07.1 | length 22.3
  L1 [Signal/Power] w0.25: DA1.2 34.817,106.517 DA1.2@35.213,106.517 ; pad.5@35.315,108.3 35.777,108.3 35.923,108.154 ; 35.923,107.373 35.996,107.3 ; RA07.1@36.75,107.05 RA07.1@36.85,107.05 ; CA08.1@38.977,107.3 CA08.1@39.1,107.423
  L1 [Signal/Power] w0.3: DA1.2@35.213,106.517 35.996,107.3 RA07.1 ; 35.923,107.373 35.923,108.154 ; 36.172,105.725 36.45,105.725 ; 37.625,105.725 39.073,107.173 CA08.1
  L1 [Signal/Power] w0.4: 35.996,107.3 35.996,105.901 36.172,105.725 ; 36.45,105.725 37.625,105.725
  L1 [Signal/Power] w0.5: 35.913,104.175 36.112,104.374 36.112,105.387 36.45,105.725
  L1 [Signal/Power] w0.6: 33.85,104.175 35.913,104.175
  L1 [Signal/Power] w0.7: JA3.1 29.15,99.475 33.85,104.175
  L4 [GND/Power] w0.25: JA3.1 JA3.1@28.054,99.904
NetDA1_1: DA1.1 RA08.1 | length 2
  L1 [Signal/Power] w0.4: RA08.1 DA1.1@33.2,106.325 ; DA1.1@33.125,106.325 DA1.1
NetDA2_1: DA2.1 RA11.1 | length 1.9
  L1 [Signal/Power] w0.4: DA2.1 38.455,98.48 RA11.1@38.725,98.75
NetDA2_2: DA2.2 JA3.2 | length 4.5
  L1 [Signal/Power] w0.4: JA3.2 JA3.2@33.13,99.98
  L1 [Signal/Power] w0.5: JA3.2@33.13,99.98 DA2.2
NetDA3_1: DA3.1 RA12.1 | length 1.9
  L1 [Signal/Power] w0.3: RA12.1 50.975,92.175 51.225,91.925 DA3.1
NetDA3_2: DA3.2 JC1.2 JC2.1 | length 12.5
  L1 [Signal/Power] w0.3: DA3.2 54.225,91.925 54.725,92.425 54.725,96.925
  L1 [Signal/Power] w0.5: JC2.1 54.725,96.925 JC1.2
NetFB1_1: FB1.1 UB2.5 UB2.6
NetFB1_2: FB1.2 JB6.A9 JB6.B9 | length 24.8
  L1 [Signal/Power] w0.5: FB1.2 60.85,111.05 61,110.9 61,110.375 63.827,107.548 ; JB6.B9 70.627,104.237 69.712,104.237 68.1,102.625 63.476,102.625 63.3,102.801 63.3,107.022 63.827,107.548 ; JB6.A9 70.49,107.45 67.5,107.45 67.402,107.548 63.827,107.548
NetJA1_1: JA1.1 JA2.A9 JA2.B9 PA1.6 pad.2@27.425,130.475 Q1.2 | length 103.5
  L1 [Signal/Power] w0.3: v1(25.325,129.35) 25.357,129.35 26.466,130.459 ; 26.384,130.475 pad.2@27.425,130.475 ; JA2.B9 29.925,139.89 29.925,139.189 30.45,138.664 v2(30.45,138.475)
  L1 [Signal/Power] w0.4: Q1.2 22.999,112.46 20.2,115.259 20.2,127.475 23.5,130.775 26.084,130.775 26.384,130.475 ; v2(25.25,137.75) 26.475,138.975 26.475,139.94 JA2.A9
  L4 [GND/Power] w0.3: v2(25.25,137.75) 24.4,138.6 22.8,138.6 19.775,135.575 19.775,126.95 21.725,125 25.149,125 25.325,125.176 v1(25.325,129.35) ; JA1.1 42.95,143.925 46.721,143.925 46.809,143.837 46.846,143.8 46.869,143.753 47.525,142.361 cw(c44.706,141.032) 47.526,142.36 cw(c44.706,141.032) 46.296,138.351 ccw(c46.45,138.094) 46.15,138.106 46.15,138.1 46.15,138.094 46.15,131.545 PA1.6
  L4 [GND/Power] w0.5: v2(25.25,137.75) 25.325,137.675 26.5,137.675 27.3,138.475 v2(30.45,138.475) ; v2@30.546,138.379 v2(30.45,138.475) ; JA1.1 40.3,142.025 30.626,142.025 30.45,141.849 v2(30.45,138.475)
NetJB2_2: JB2.2 UB1.16 | length 6.9
  L1 [Signal/Power] w0.3: UB1.16 64.325,130.55 64.85,130.55 65.825,131.525 68.869,131.525 69.15,131.806 70.406,131.806 JB2.2
NetJB3_2: JB3.2 UB1.8 | length 3.4
  L1 [Signal/Power] w0.3: UB1.8 58.45,125.136 59.586,124 59.586,123.069 JB3.2
NetJB3_3: JB3.3 UB1.9 | length 4.6
  L1 [Signal/Power] w0.3: JB3.3 60.925,123.125 63.725,125.925 UB1.9
NetJB3_4: JB3.4 UB2.3 | length 7.7
  L1 [Signal/Power] w0.3: JB3.4 62.245,122.95 63.875,122.95 v1(63.925,122.9) ; UB2.3 63.6,117.175 v1(63.6,118.6)
  L4 [GND/Power] w0.5: v1(63.6,118.6) 63.6,122.467 63.925,122.792 v1(63.925,122.9)
NetJB6_A5: JB6.A5 RB2.2 | length 4
  L1 [Signal/Power] w0.3: RB2.2 67.2,104.075 67.65,104.525 68.325,104.525 69.012,105.213 70.582,105.213 JB6.A5
NetJB6_B5: JB6.B5 RB1.2 | length 3.9
  L1 [Signal/Power] w0.3: RB1.2@66.875,106.05 66.912,106.087 68.912,106.087 69.112,106.288 70.632,106.288 JB6.B5
NetPA1_1: PA1.1 pad.5@28.642,129.048 RA03.2 | length 26
  L1 [Signal/Power] w0.25: RA03.2@27.675,126.163 27.675,126.925 27.675,127.3 28.642,128.267 pad.5@28.642,129.048
  L1 [Signal/Power] w0.3: 27,126.925 27.675,126.925
  L1 [Signal/Power] w0.4: v3(26.425,126.275) 26.425,126.35 27,126.925
  L4 [GND/Power] w0.3: v3(26.425,126.275) 35.925,116.775 42.549,116.775 43.254,116.07 PA1.1
NetPA1_2: PA1.2 pad.6@29.142,129.048 RA02.2 | length 22.5
  L1 [Signal/Power] w0.25: pad.6@29.142,129.048 29.142,127.633 29.85,126.925 30.1,126.925 30.804,126.925 30.95,126.779 RA02.2
  L1 [Signal/Power] w0.3: v3(29.325,126.1) 29.325,126.15 30.1,126.925
  L4 [GND/Power] w0.3: v3(29.325,126.1) 36.815,118.61 PA1.2
NetPA1_3: PA1.3 pad.7@29.642,129.048 RA01.2 | length 20.7
  L1 [Signal/Power] w0.25: pad.7@29.642,129.048 29.644,129.046 29.644,128.281 30.5,127.425 33.082,127.425 33.632,126.875 ; 33.425,126.875 33.632,126.875 ; RA01.2 34.101,126.075 33.926,126.25 33.926,126.581 33.632,126.875
  L1 [Signal/Power] w0.3: v3@32.525,125.975 33.425,126.875
  L4 [GND/Power] w0.3: v3(32.56,125.975) 37.45,121.085 43.31,121.085 PA1.3
NetQ1_3: pad.3@33.345,108.8 pad.4@33.345,108.3 Q1.3 RA04.2 | length 10.6
  L1 [Signal/Power] w0.25: pad.4@33.345,108.3 32.954,108.3 32.77,108.484 32.77,108.616 32.807,108.654 32.954,108.8 pad.3@33.345,108.8
  L1 [Signal/Power] w0.3: Q1.3 26.951,110.69 27.374,110.267 27.374,109.076 27.796,108.654 31.1,108.654 ; RA04.2 31.1,108.654 ; 32.807,108.654 31.1,108.654
NetRA04_1: pad.2@33.345,109.3 RA04.1 RA05.2 | length 5.9
  L1 [Signal/Power] w0.25: RA05.2@29.875,109.825 RA05.2 30.204,109.55 30.35,109.696 30.35,110.325 30.496,110.471 31.1,110.471 31.679,110.471 31.85,110.3 31.85,109.446 31.996,109.3 pad.2@33.345,109.3
NetRA06_2: pad.7@35.315,109.3 RA06.2 | length 8.4
  L1 [Signal/Power] w0.25: pad.7@35.315,109.3 36.1,109.3 ; RA06.2@41.1,109.35 RA06.2
  L1 [Signal/Power] w0.3: 36.1,109.3 36.85,110.05
  L1 [Signal/Power] w0.4: 36.85,110.05 36.85,110.55 37.1,110.8 40.866,110.8 41.1,110.566 RA06.2@41.1,109.35
NetRA07_2: pad.6@35.305,108.801 RA07.2 | length 1.8
  L1 [Signal/Power] w0.25: pad.6@35.305,108.8 RA07.2
pads on no net: JA2.1 JA2.2 JA2.3 JA2.4 JB6.1 JB6.2 JB6.3 JB6.4 PA1.8 UB1.2 UB1.3 UB1.12 UB1.13 UB1.14 UB1.15 UB2.4

## Polygon pours and split planes (outlines as drawn)
GND on L1 [Signal/Power] "GND_L01_P009" (solid, pour order 9): 64.075,103.775 64.15,106.3 64.575,106.725 66.225,106.725 66.225,103.325 66.2,103.3 64.487,103.437 64.275,103.65
GND on L1 [Signal/Power] "GND_L01_P010" (solid, pour order 10): 62.191,111.45 63.65,111.45 63.65,110.1 64.725,109.025 71.25,109.025 71.4,108.875 71.4,108.05 69.6,108.05 69.475,107.925 64.4,107.925 62.35,109.975
NetFB1_1 on L1 [Signal/Power] "NETFB1_1_L01_P016" (solid, pour order 16): 61,116.65 60.925,116.575 60.25,116.575 60.25,112.15 60.375,112.025 61.375,112.025 61.375,114.575 61.625,114.825 61.625,116.55
GND on L4 [GND/Power] "GND_L02_P015" (solid, pour order 15): 46.65,121.375 45.85,122.175 38.325,122.175 31.5,129 31.5,132.55 34.45,135.5 33.2,136.75 33.2,136.7 26.65,130.15 24.25,130.15 24.25,127.075 22.925,125.75 21.525,125.75 20.525,126.75 20.525,136.025 22.85,138.35 24.225,138.35 24.225,137.775 25.575,136.425 26.525,137.375 29.475,137.375 29.825,137.025 31.775,138.975 41.05,138.975 45.15,143.075 45.925,143.075 46.8,142.2 46.8,140.996 41.7,135.896 41.7,127.8 44.175,127.8 46.65,125.35 46.65,130.225 70.525,130.225 72.575,128.175 72.575,125.375 67.5,125.375 66.475,126.4 66.475,127.45 65.75,127.45 64.8,126.5 56.525,126.5 56.525,125.125 53.125,121.725 53.125,113.625 57.45,113.625 57.887,113.188 65.738,113.188 66.971,114.405 66.975,114.409 66.975,115.575 63.25,115.575 62.85,115.975 62.85,116 58.1,116 56.4,117.7 56.45,117.75 56.45,119.725 60.925,119.725 62.9,117.75 65.75,117.75 65.75,121.775 66.6,122.625 66.6,123.025 66.75,122.875 74,122.875 74,100.6 71.075,97.675 71.075,89.425 50.325,89.425 49.85,89.9 49.85,91.425 47.55,91.425 46.812,92.163 26.275,92.2 22.625,95.85 22.625,115.525 38.175,115.525 41.075,113.625 46.425,113.625 46.65,113.85

## Other copper
L1 [Signal/Power]:
  region net GND: 34.733,109.849 34.735,109.849 34.738,109.848 34.74,109.848 34.743,109.847 34.745,109.846 34.748,109.845 34.75,109.843 34.752,109.842 34.754,109.84 34.756,109.839 34.758,109.837 34.76,109.835 34.762,109.833 34.764,109.831 34.765,109.829 34.767,109.827 34.768,109.825 34.77,109.823 34.771,109.82 34.772,109.818 34.773,109.815 34.773,109.813 34.774,109.81 34.774,109.808 34.775,109.805 34.775,109.803 34.775,109.8 34.775,108.3 34.775,108.297 34.775,108.295 34.774,108.292 34.774,108.29 34.773,108.287 34.773,108.285 34.772,108.282 34.771,108.28 34.77,108.277 34.768,108.275 34.767,108.273 34.765,108.271 34.764,108.269 34.762,108.267 34.76,108.265 34.758,108.263 34.756,108.261 34.754,108.26 34.752,108.258 34.75,108.257 34.748,108.255 34.745,108.254 34.743,108.253 34.74,108.252 34.738,108.252 34.735,108.251 34.733,108.251 34.73,108.25 33.92,108.25 33.917,108.251 33.915,108.251 33.912,108.252 33.91,108.252 33.907,108.253 33.905,108.254 33.902,108.255 33.9,108.257 33.898,108.258 33.896,108.26 33.894,108.261 33.892,108.263 33.89,108.265 33.888,108.267 33.886,108.269 33.885,108.271 33.883,108.273 33.882,108.275 33.88,108.277 33.879,108.28 33.878,108.282 33.877,108.285 33.877,108.287 33.876,108.29 33.876,108.292 33.875,108.295 33.875,108.297 33.875,108.3 33.875,109.8 33.875,109.803 33.875,109.805 33.876,109.808 33.876,109.81 33.877,109.813 33.877,109.815 33.878,109.818 33.879,109.82 33.88,109.823 33.882,109.825 33.883,109.827 33.885,109.829 33.886,109.831 33.888,109.833 33.89,109.835 33.892,109.837 33.894,109.839 33.896,109.84 33.898,109.842 33.9,109.843 33.902,109.845 33.905,109.846 33.907,109.847 33.91,109.848 33.912,109.848 33.915,109.849 33.917,109.849 33.92,109.85 34.73,109.85
  region: 68.325,138.389 68.321,138.389 68.321,138.385 68.312,138.385 68.312,138.38 68.299,138.38 68.299,138.376 68.29,138.376 68.29,138.372 68.281,138.372 68.281,138.367 68.273,138.367 68.273,138.363 68.259,138.363 68.259,138.359 68.251,138.359 68.251,138.354 68.242,138.354 68.242,138.376 68.246,138.376 68.246,138.389 68.251,138.389 68.251,138.398 68.255,138.398 68.255,138.402 68.259,138.402 68.259,138.407 68.264,138.407 68.264,138.411 68.268,138.411 68.268,138.415 68.281,138.415 68.281,138.42 68.299,138.42 68.299,138.415 68.308,138.415 68.308,138.411 68.312,138.411 68.312,138.407 68.316,138.407 68.316,138.402 68.321,138.402 68.321,138.398 68.325,138.398 68.325,138.394
  region: 67.892,138.21 67.892,138.214 67.888,138.214 67.888,138.223 67.883,138.223 67.883,138.232 67.879,138.232 67.879,138.271 67.883,138.271 67.883,138.28 67.888,138.28 67.888,138.289 67.892,138.289 67.892,138.297 67.897,138.297 67.897,138.302 67.901,138.302 67.901,138.306 67.905,138.306 67.905,138.31 67.914,138.31 67.914,138.315 67.927,138.315 67.927,138.319 67.945,138.319 67.945,138.315 67.958,138.315 67.958,138.31 67.962,138.31 67.962,138.306 67.966,138.306 67.966,138.302 67.971,138.302 67.971,138.293 67.975,138.293 67.975,138.28 67.98,138.28 67.98,138.258 67.975,138.258 67.975,138.241 67.971,138.241 67.971,138.232 67.966,138.232 67.966,138.227 67.962,138.227 67.962,138.223 67.958,138.223 67.958,138.219 67.953,138.219 67.953,138.214 67.949,138.214 67.949,138.21 67.945,138.21 67.945,138.206 67.931,138.206 67.931,138.201 67.91,138.201 67.91,138.206 67.901,138.206 67.901,138.21 67.897,138.21
  region: 2335 vertices and 17 holes, not listed, extent 65.299,138.031 69.659,142.391

## Silkscreen, mask and mechanical layers (free items; w line width, h text height)
Top Overlay:
  circle w0.2: c32.345,110.5 r0.1
  region: 31.052,131.149 31.306,131.149 31.306,130.768 31.052,130.768
  lines w0.152: 27.52,129.087 27.52,129.499 ; 27.52,131.419 27.52,131.831 ; 30.264,129.087 30.264,129.499 ; 30.264,131.419 30.264,131.831
  text "Asia Bettilyon & Rachel Wang" at 51.25,138.25 h1
  text "BMS" at 61,132.85 h1
  text "*" at 26.149,131.653 h1.27
  text "PD Trigger" at 20,128.75 h1 r90
  text "Jetson Protection" at 25.025,115.175 h1
  text "Servo Connection" at 44.425,102.375 h1
Top Paste:
  drawing of 2 lines, arcs and shapes, not listed
Top Solder:
  drawing of 9 lines, arcs and shapes, not listed
Mechanical 1:
  lines w0.254: 16.8,145.01 16.8,88.432 ccw(c18.332,88.432) 18.332,86.9 75.43,86.9 ccw(c75.43,88.17) 76.7,88.17 ; 16.8,145.078 cw(c17.99,145.078) 17.99,146.268 18.3,146.268 75.168,146.2 cw(c75.168,144.668) 76.7,144.668 ; 76.7,88.127 76.7,144.625
Mechanical 13:
  circle w0.2: c32.345,110.5 r0.1
  lines w0.025: 27.647,130.434 28.917,131.704 ; 27.392,129.807 27.392,130.111 27.647,130.111 27.647,129.807 27.392,129.807 ; 27.392,130.307 27.392,130.611 27.647,130.611 27.647,130.307 27.392,130.307 ; 27.392,130.807 27.392,131.111 27.647,131.111 27.647,130.807 27.392,130.807 ; 27.647,129.214 27.647,131.704 30.137,131.704 30.137,129.214 27.647,129.214 ; 27.99,128.959 27.99,129.214 28.294,129.214 28.294,128.959 27.99,128.959 ; 27.99,131.704 27.99,131.959 28.294,131.959 28.294,131.704 27.99,131.704 ; 28.49,128.959 28.49,129.214 28.794,129.214 28.794,128.959 28.49,128.959 ; 28.49,131.704 28.49,131.959 28.794,131.959 28.794,131.704 28.49,131.704 ; 28.99,128.959 28.99,129.214 29.294,129.214 29.294,128.959 28.99,128.959 ; 28.99,131.704 28.99,131.959 29.294,131.959 29.294,131.704 28.99,131.704 ; 29.49,128.959 29.49,129.214 29.794,129.214 29.794,128.959 29.49,128.959 ; 29.49,131.704 29.49,131.959 29.794,131.959 29.794,131.704 29.49,131.704 ; 30.137,129.807 30.137,130.111 30.392,130.111 30.392,129.807 30.137,129.807 ; 30.137,130.307 30.137,130.611 30.392,130.611 30.392,130.307 30.137,130.307 ; 30.137,130.807 30.137,131.111 30.392,131.111 30.392,130.807 30.137,130.807
  lines w0.127: 33.33,108.05 33.33,110.05 35.33,110.05 35.33,108.05 33.33,108.05
  text "*" at 27.659,130.574 h1.27
Mechanical 15:
  region: 27.505,128.695 27.137,128.695 27.137,129.312 26.476,129.312 26.476,131.582 27.137,131.582 27.137,132.2 27.505,132.2 27.505,132.862 30.275,132.862 30.275,132.2 30.643,132.2 30.643,131.582 31.304,131.582 31.304,129.312 30.643,129.312 30.643,128.695 30.275,128.695 30.275,128.033 27.505,128.033
  lines w0.05: 32.845,107.8 32.845,110.3 35.815,110.3 35.815,107.8 32.845,107.8
  lines w0.152: 26.478,129.324 27.139,129.324 27.139,128.706 27.507,128.706 27.507,128.045 30.277,128.045 30.277,128.706 30.645,128.706 30.645,129.324 31.306,129.324 31.306,131.594 30.645,131.594 30.645,132.212 30.277,132.212 30.277,132.873 27.507,132.873 27.507,132.212 27.139,132.212 26.478,132.212 26.478,129.324